# EAGLE board lcd_breakout (EAGLE 9.6.2)
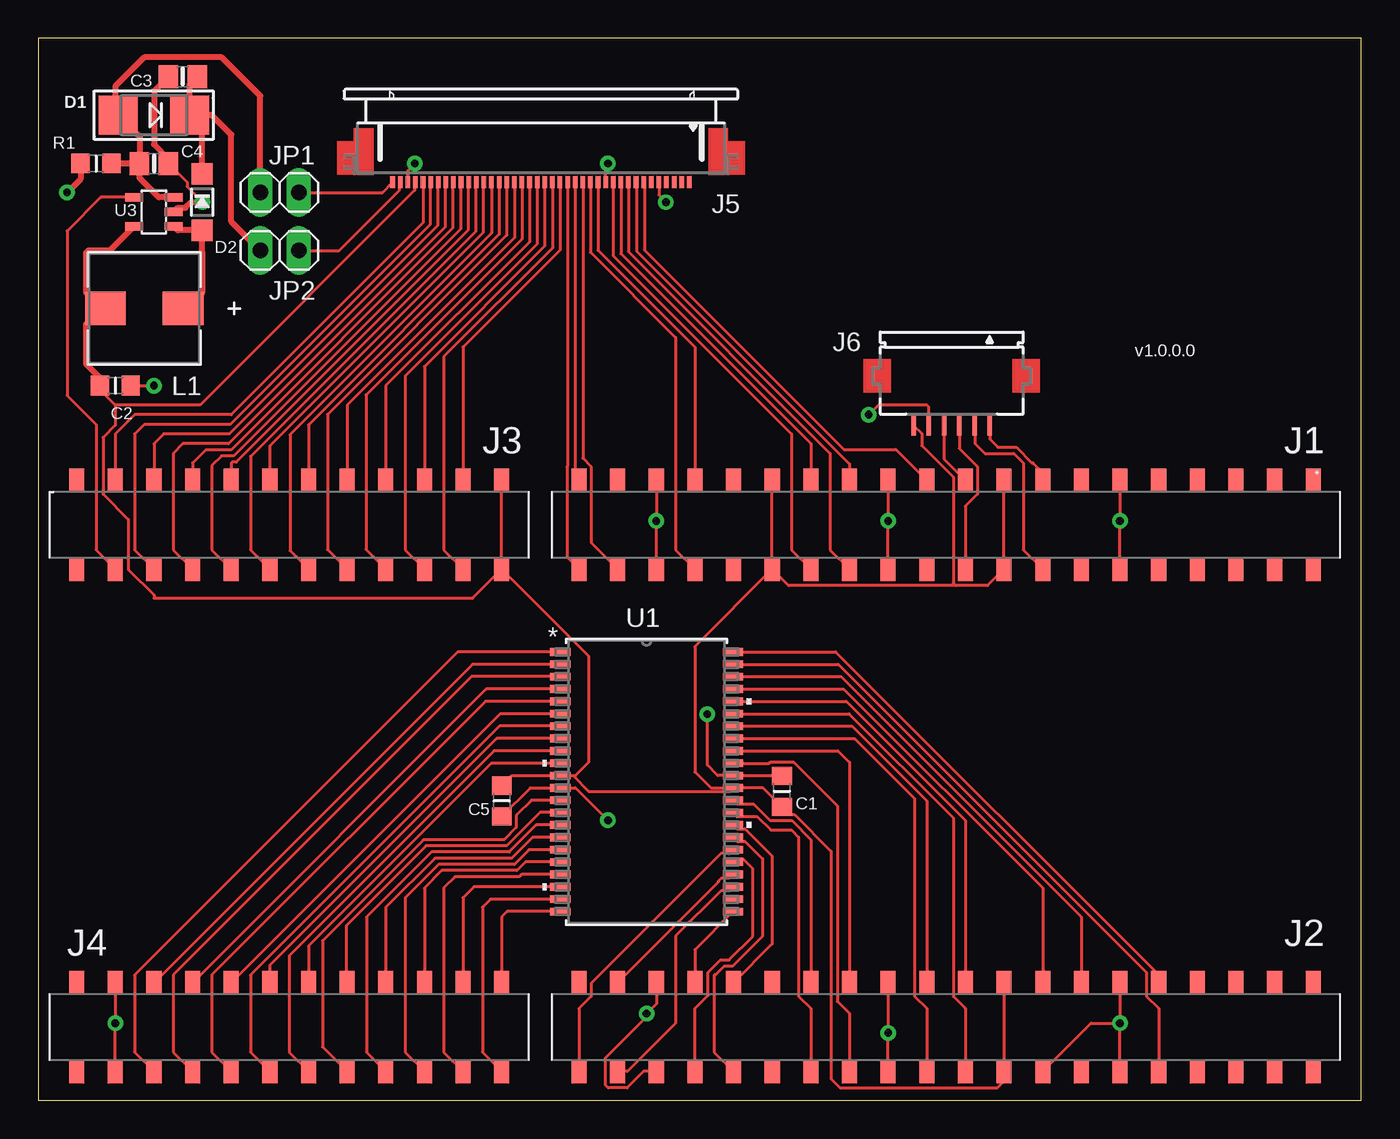
[diagram p0: board, top side]
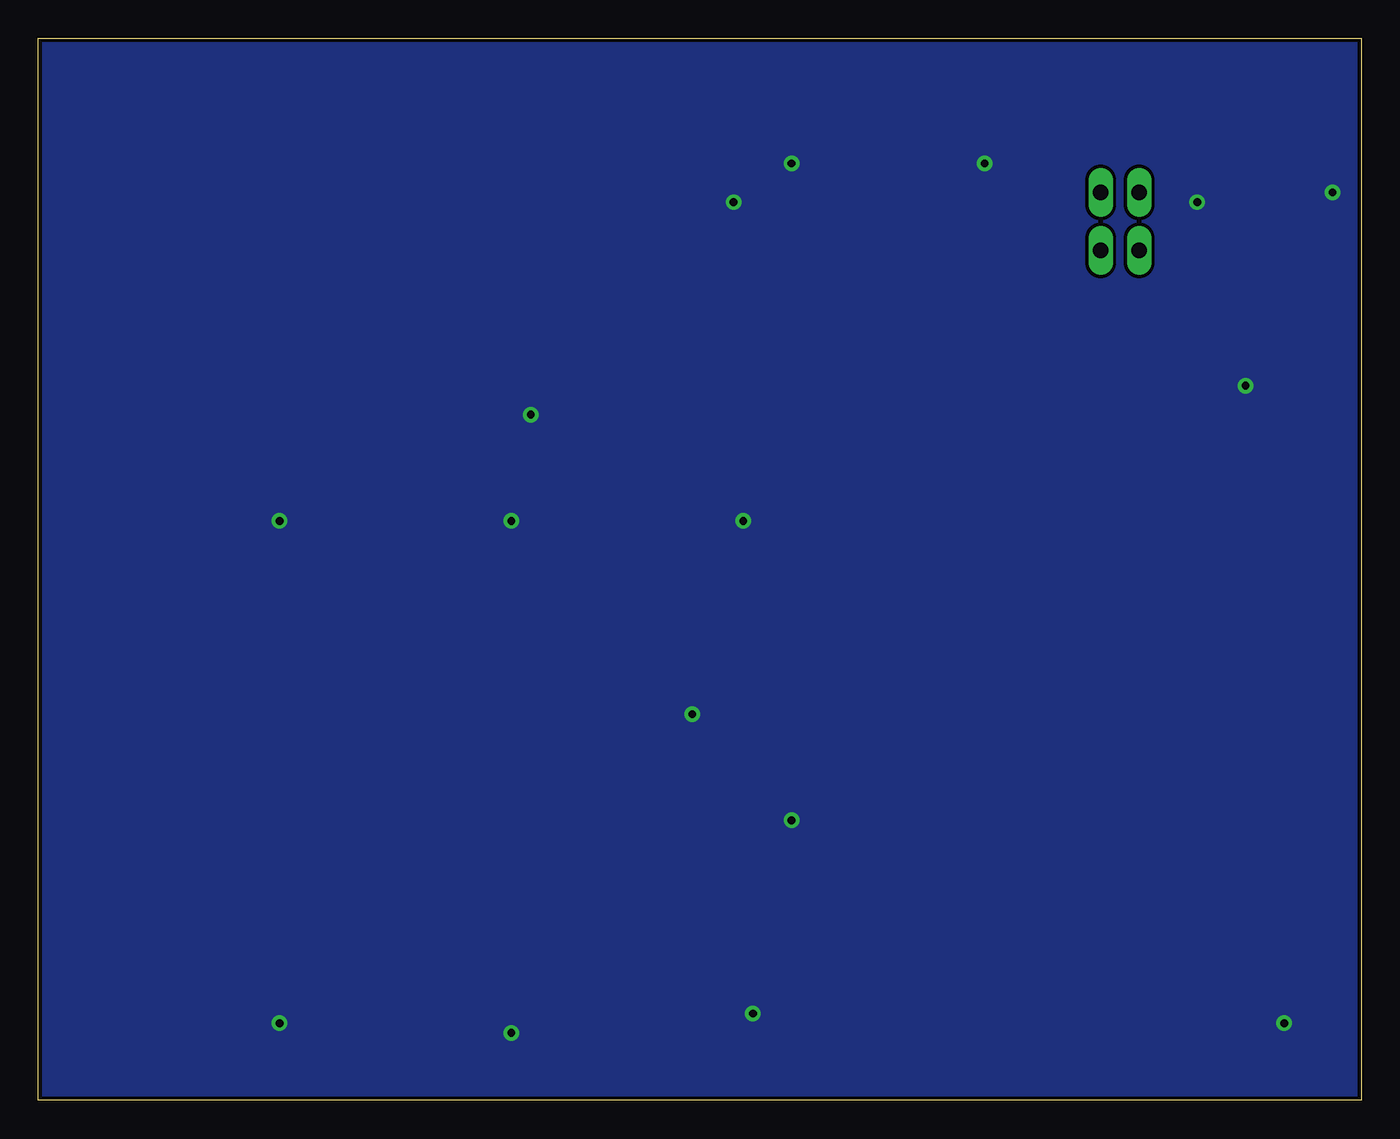
[diagram p1: board, bottom side, seen from below]

Size 87 x 69.84 mm. Coordinates in mm from the lower left corner, seen from the top.
Outline: 0,0 87,0.01 87,69.84 0,69.84 0,0
Copper layers (1*16): Top 0.035mm / dielectric 1.5mm / Bottom 0.035mm
Design rules "SparkFun": minimum track width 8mil, minimum drill 20mil, track to track 8mil, track to pad 8mil, pad to pad 8mil, via to via 8mil, smd to smd 8mil, copper to edge 10mil, drill to drill 8mil, minimum pad ring 12mil, minimum via ring 10mil, stop-mask expansion 4mil, vias tented up to drill 25mil, thermal gap 10mil

## Footprints (pad centres in the part's own frame; a part is rotated, then mirrored left to right if it is on the bottom)
_0805MP = smd 1.2 x 1.3: 1 -1.016,0; 2 1.016,0
0805-NO = smd 1.3 x 1.5: 1 -0.95,0; 2 0.95,0
SMADIODE = smd 2.54 x 2.54: A 2.349,0; C -2.349,0
SOD-123 = smd 1.4 x 1.4: A 1.85,0; C -1.85,0
54132-4097 = smd 0.3 x 0.8: 1 12.25,2.5; 2 11.75,2.5; 3 11.25,2.5; 4 10.75,2.5; 5 10.25,2.5; 6 9.75,2.5; 7 9.25,2.5; 8 8.75,2.5; 9 8.25,2.5; 10 7.75,2.5; 11 7.25,2.5; 12 6.75,2.5; 13 6.25,2.5; 14 5.75,2.5; 15 5.25,2.5; 16 4.75,2.5; 17 4.25,2.5; 18 3.75,2.5; 19 3.25,2.5; 20 2.75,2.5; 21 2.25,2.5; 22 1.75,2.5; 23 1.25,2.5; 24 0.75,2.5; 25 0.25,2.5; 26 -0.25,2.5; 27 -0.75,2.5; 28 -1.25,2.5; 29 -1.75,2.5; 30 -2.25,2.5; 31 -2.75,2.5; 32 -3.25,2.5; 33 -3.75,2.5; 34 -4.25,2.5; 35 -4.75,2.5; 36 -5.25,2.5; 37 -5.75,2.5; 38 -6.25,2.5; 39 -6.75,2.5; 40 -7.25,2.5
52271-0679 = smd 0.3 x 1.3: 1 1.5,3.25; 2 0.5,3.25; 3 -0.5,3.25; 4 -1.5,3.25; 5 -2.5,3.25; 6 -3.5,3.25
1X02 = drill 1.016 long: 1 -1.27,0; 2 1.27,0
IND_744314101_WRE = smd 2.692 x 2.21: 1 -2.553,0; 2 2.553,0
PTSB0044GG-A_REN = smd 1.321 x 0.508: 1 -5.677,8.534; 2 -5.677,7.722; 3 -5.677,6.909; 4 -5.677,6.096; 5 -5.677,5.283; 6 -5.677,4.47; 7 -5.677,3.658; 8 -5.677,2.845; 9 -5.677,2.032; 10 -5.677,1.219; 11 -5.677,0.406; 12 -5.677,-0.406; 13 -5.677,-1.219; 14 -5.677,-2.032; 15 -5.677,-2.845; 16 -5.677,-3.658; 17 -5.677,-4.47; 18 -5.677,-5.283; 19 -5.677,-6.096; 20 -5.677,-6.909; 21 -5.677,-7.722; 22 -5.677,-8.534; 23 5.677,-8.534; 24 5.677,-7.722; 25 5.677,-6.909; 26 5.677,-6.096; 27 5.677,-5.283; 28 5.677,-4.47; 29 5.677,-3.658; 30 5.677,-2.845; 31 5.677,-2.032; 32 5.677,-1.219; 33 5.677,-0.406; 34 5.677,0.406; 35 5.677,1.219; 36 5.677,2.032; 37 5.677,2.845; 38 5.677,3.658; 39 5.677,4.47; 40 5.677,5.283; 41 5.677,6.096; 42 5.677,6.909; 43 5.677,7.722; 44 5.677,8.534
MORPH-IC-II = smd 0.991 x 1.549: J1.1 -68.58,-18.542; J1.2 -68.58,-12.7; J1.3 -66.04,-18.542; J1.4 -66.04,-12.7; J1.5 -63.5,-18.542; J1.6 -63.5,-12.7; J1.7 -60.96,-18.542; J1.8 -60.96,-12.7; J1.9 -58.42,-18.542; J1.10 -58.42,-12.7; J1.11 -55.88,-18.542; J1.12 -55.88,-12.7; J1.13 -53.34,-18.542; J1.14 -53.34,-12.7; J1.15 -50.8,-18.542; J1.16 -50.8,-12.7; J1.17 -48.26,-18.542; J1.18 -48.26,-12.7; J1.19 -45.72,-18.542; J1.20 -45.72,-12.7; J1.21 -43.18,-18.542; J1.22 -43.18,-12.7; J1.23 -40.64,-18.542; J1.24 -40.64,-12.7; J1.25 -38.1,-18.542; J1.26 -38.1,-12.7; J1.27 -35.56,-18.542; J1.28 -35.56,-12.7; J1.29 -33.02,-18.542; J1.30 -33.02,-12.7; J1.31 -30.48,-18.542; J1.32 -30.48,-12.7; J1.33 -27.94,-18.542; J1.34 -27.94,-12.7; J1.35 -25.4,-18.542; J1.36 -25.4,-12.7; J1.37 -22.86,-18.542; J1.38 -22.86,-12.7; J1.39 -20.32,-18.542; J1.40 -20.32,-12.7; J2.1 -68.58,14.478; J2.2 -68.58,20.32; J2.3 -66.04,14.478; J2.4 -66.04,20.32; J2.5 -63.5,14.478; J2.6 -63.5,20.32; J2.7 -60.96,14.478; J2.8 -60.96,20.32; J2.9 -58.42,14.478; J2.10 -58.42,20.32; J2.11 -55.88,14.478; J2.12 -55.88,20.32; J2.13 -53.34,14.478; J2.14 -53.34,20.32; J2.15 -50.8,14.478; J2.16 -50.8,20.32; J2.17 -48.26,14.478; J2.18 -48.26,20.32; J2.19 -45.72,14.478; J2.20 -45.72,20.32; J2.21 -43.18,14.478; J2.22 -43.18,20.32; J2.23 -40.64,14.478; J2.24 -40.64,20.32; J2.25 -38.1,14.478; J2.26 -38.1,20.32; J2.27 -35.56,14.478; J2.28 -35.56,20.32; J2.29 -33.02,14.478; J2.30 -33.02,20.32; J2.31 -30.48,14.478; J2.32 -30.48,20.32; J2.33 -27.94,14.478; J2.34 -27.94,20.32; J2.35 -25.4,14.478; J2.36 -25.4,20.32; J2.37 -22.86,14.478; J2.38 -22.86,20.32; J2.39 -20.32,14.478; J2.40 -20.32,20.32; J3.1 -15.24,-18.542; J3.2 -15.24,-12.7; J3.3 -12.7,-18.542; J3.4 -12.7,-12.7; J3.5 -10.16,-18.542; J3.6 -10.16,-12.7; J3.7 -7.62,-18.542; J3.8 -7.62,-12.7; J3.9 -5.08,-18.542; J3.10 -5.08,-12.7; J3.11 -2.54,-18.542; J3.12 -2.54,-12.7; J3.13 0,-18.542; J3.14 0,-12.7; J3.15 2.54,-18.542; J3.16 2.54,-12.7; J3.17 5.08,-18.542; J3.18 5.08,-12.7; J3.19 7.62,-18.542; J3.20 7.62,-12.7; J3.21 10.16,-18.542; J3.22 10.16,-12.7; J3.23 12.7,-18.542; J3.24 12.7,-12.7; J4.1 -15.24,14.478; J4.2 -15.24,20.32; J4.3 -12.7,14.478; J4.4 -12.7,20.32; J4.5 -10.16,14.478; J4.6 -10.16,20.32; J4.7 -7.62,14.478; J4.8 -7.62,20.32; J4.9 -5.08,14.478; J4.10 -5.08,20.32; J4.11 -2.54,14.478; J4.12 -2.54,20.32; J4.13 0,14.478; J4.14 0,20.32; J4.15 2.54,14.478; J4.16 2.54,20.32; J4.17 5.08,14.478; J4.18 5.08,20.32; J4.19 7.62,14.478; J4.20 7.62,20.32; J4.21 10.16,14.478; J4.22 10.16,20.32; J4.23 12.7,14.478; J4.25 12.7,20.32
SOT23-5@1 = smd 0.55 x 1.2: 1 -0.95,-1.3; 2 0,-1.3; 3 0.95,-1.3; 4 0.95,1.3; 5 -0.95,1.3

## Placement (x,y rotation side)
C1  0.1uF  [_0805MP]  48.9,20.32 90 top
C2  10uF  [_0805MP]  5.08,46.99 0 top
C3  1uF  [0805-NO]  9.53,67.31 180 top
C4  0.1uF  [0805-NO]  7.62,61.59 0 top
C5  0.1uF  [_0805MP]  30.48,19.68 270 top
D1  MM3Z18VT1G  [SMADIODE]  7.62,64.77 180 top
D2  MBR0540  [SOD-123]  10.79,59.05 270 top
J5  NHD-5.0-800480TF-ATXL-CTP_LCD  [54132-4097]  35.56,62.87 180 top
J6  NHD-5.0-800480TF-ATXL-CTP_TOUCH  [52271-0679]  59.05,47.62 180 top
JP1  [1X02]  15.88,59.69 0 top
JP2  [1X02]  15.88,55.88 0 top
L1  10 uH  [IND_744314101_WRE]  6.99,52.07 180 top
R1  5.6  [_0805MP]  3.81,61.59 0 top
U1  RMLV0416EGSB-4S2HA1  [PTSB0044GG-A_REN]  40.01,20.95 0 top
U2  FTDI_MORPH-IC_II  [MORPH-IC-II]  15.24,22.23 180 top
U3  FAN5333BSX  [SOT23-5@1]  7.62,58.42 90 top

## Library data of the parts
C1 C4 C5 = microbuilder; DPN: 478-12799-1-ND; MPN: 0805ZD104KAT2A
C2 = microbuilder; DPN: 1276-6456-1-ND; MPN: CL21A106KPFNNNG
C3 = microbuilder; DPN: 1276-2395-1-ND; MPN: CL21A105KACLNNC
D1 = microbuilder; DPN: MM3Z18VT1GOSCT-ND; MPN: MM3Z18VT1G
D2 = microbuilder; DPN: MBR0540CT-ND; MPN: MBR0540
J5 = ik; DPN: WM3431CT-ND; MPN: 54104-4031
J6 = ik; DPN: WM7955CT-ND; MPN: 52271-0679
JP1 JP2 = pinhead; DPN: A121364-ND; MPN: 4-103328-1
L1 = ultralibrarian; BUILT_BY: EMA_Justin; COPYRIGHT: Copyright (C) 2016 Accelerated Designs. All rights reserved; DPN: 732-2180-1-ND; MANUFACTURER_PART_NUMBER: 744314101; MPN: 744314101; SOURCELIBRARY: Wurth_2018-12-15; VENDOR: Wurth Electronics
R1 = microbuilder; DPN: 311-5.60CRCT-ND; MPN: RC0805FR-075R6L
U1 = ultralibrarian; BUILT_BY: EMA_Jessica; COPYRIGHT: Copyright (C) 2018 Accelerated Designs. All rights reserved; DPN: RMLV0416EGSB-4S2; MANUFACTURER_PART_NUMBER: RMLV0416EGSB-4S2#HA1; MPN: RMLV0416EGSB-4S2#HA1; SOURCELIBRARY: Renesas_2019-10-17_1; VENDOR: Renesas Electronics
U2 = ik; DPN: 2x S5729-ND, 2x S5721-ND; MPN: 2x NPPC202KFMS-RC, 2x NPPC122KFMS-RC
U3 = microbuilder; DPN: FAN5333BSXCT-ND; MPN: FAN5333BSX

## Nets
+3V3: C1.1 C2.1 C5.1 J5.4 J6.1 L1.2 U1.11 U1.33 U2.J1.17 U2.J1.18 U2.J1.29 U2.J1.30 U2.J2.17 U2.J2.18 U2.J3.1 U2.J3.2 U3.5
+18V: C3.1 D1.C D2.C JP2.1
ADDR_A0: U1.5 U2.J4.16
ADDR_A1: U1.4 U2.J4.17
ADDR_A2: U1.3 U2.J4.18
ADDR_A3: U1.2 U2.J4.19
ADDR_A4: U1.1 U2.J4.20
ADDR_A5: U1.44 U2.J2.9
ADDR_A6: U1.43 U2.J2.10
ADDR_A7: U1.42 U2.J2.13
ADDR_A8: U1.27 U2.J2.34
ADDR_A9: U1.26 U2.J2.37
ADDR_A10: U1.25 U2.J2.38
ADDR_A11: U1.24
ADDR_A12: U1.23 U2.J2.33
ADDR_A13: U1.22 U2.J4.1
ADDR_A14: U1.21 U2.J4.2
ADDR_A15: U1.20 U2.J4.3
ADDR_A16: U1.19 U2.J4.4
ADDR_A17: U1.18 U2.J4.5
B0: J5.21 U2.J3.5
B1: J5.22 U2.J3.4
B2: J5.23 U2.J3.3
B3: J5.24 U2.J1.40
B4: J5.25 U2.J1.39
B5: J5.26 U2.J1.38
B6: J5.27 U2.J1.34
B7: J5.28 U2.J1.33
CLKIN: J5.30 U2.J1.28
DATA_IO0: U1.7 U2.J4.14
DATA_IO1: U1.8 U2.J4.13
DATA_IO2: U1.9 U2.J4.12
DATA_IO3: U1.10 U2.J4.11
DATA_IO4: U1.13 U2.J4.10
DATA_IO5: U1.14 U2.J4.9
DATA_IO6: U1.15 U2.J4.8
DATA_IO7: U1.16 U2.J4.7
DATA_IO8: U1.29 U2.J2.32
DATA_IO9: U1.30 U2.J2.31
DATA_IO10: U1.31 U2.J2.28
DATA_IO11: U1.32 U2.J2.27
DATA_IO12: U1.35 U2.J2.26
DATA_IO13: U1.36 U2.J2.25
DATA_IO14: U1.37 U2.J2.22
DATA_IO15: U1.38 U2.J2.21
DEN: J5.34 U2.J1.21
G0: J5.13 U2.J3.13
G1: J5.14 U2.J3.12
G2: J5.15 U2.J3.11
G3: J5.16 U2.J3.10
G4: J5.17 U2.J3.9
G5: J5.18 U2.J3.8
G6: J5.19 U2.J3.7
G7: J5.20 U2.J3.6
GND: C1.2 C2.2 C3.2 C4.2 C5.2 J5.3 J5.29 J5.36 J6.2 R1.1 U1.12 U1.34 U2.J1.11 U2.J1.12 U2.J1.23 U2.J1.24 U2.J1.35 U2.J1.36 U2.J2.11 U2.J2.12 U2.J2.16 U2.J2.23 U2.J2.24 U2.J2.35 U2.J2.36 U2.J4.21 U2.J4.22 U3.2
HSD: J5.32 U2.J1.26
INTN: J6.5 U2.J1.16
LED+: J5.2 JP2.2
LED-: J5.1 JP1.2
LEDK: C4.1 D1.A JP1.1 R1.2 U3.3
LIGHT: U2.J3.22 U3.4
N$8: D2.A L1.1 U3.1
R0: J5.5 U2.J3.21
R1: J5.6 U2.J3.20
R2: J5.7 U2.J3.19
R3: J5.8 U2.J3.18
R4: J5.9 U2.J3.17
R5: J5.10 U2.J3.16
R6: J5.11 U2.J3.15
R7: J5.12 U2.J3.14
RSTN: J6.6 U2.J1.15
SCL: J6.3 U2.J1.19
SDA: J6.4 U2.J1.20
SRAM_CS2: U1.28 U2.J2.40
SRAM_CS_N: U1.6 U2.J4.15
SRAM_LB_N: U1.39 U2.J2.20
SRAM_OE_N: U1.41 U2.J2.15
SRAM_UB_N: U1.40 U2.J2.19
SRAM_WE_N: U1.17 U2.J4.6
STBYB: J5.31 U2.J1.27
VCCSW: U2.J1.2
VCCUSB: U2.J1.1
VSD: J5.33 U2.J1.25

## Tracks (layer width: path | path; a pad name or v marks a point on that pad's centre or on a via)
+3V3
  Top 0.203: U1.11 34.3,21.34 35.31,21.34 36.2,22.23 36.2,29.21 U2.J3.2 | 45.72,20.55 47.65,20.55 C1.1 49.39,18.81 49.71,18.81 52.13,16.39 52.13,1.41 52.72,0.83 63.06,0.83 63.5,1.27 U2.J2.18 U2.J2.17 | 45.72,20.55 U1.33 44.22,20.55 43.18,21.59 43.18,29.84 U2.J1.30 | C5.1 31.14,21.36 U1.11 | J5.4 24.77,60.32 24.77,59.84 10.65,45.72 5.08,45.72 | 5.08,45.72 4.06,46.74 C2.1 | 5.08,45.72 5.08,44.39 4.28,43.59 4.28,39.87 5.94,38.2 5.94,34.9 7.62,33.22 7.62,33.02 28.57,33.02 U2.J3.2 | U2.J3.2 U2.J3.1 | U1.11 35.15,21.36 36.2,20.32 45.49,20.32 45.72,20.55 | U2.J1.30 U2.J1.29 | J6.1 58.1,43.83 58.1,43.05 60.16,40.99 60.16,34.02 60.34,33.85 | 60.34,33.85 62.42,33.85 U2.J1.18 U2.J1.17 | 60.34,33.85 49.34,33.85 U2.J1.30
  Top 0.406: C2.1 4.06,47.51 3.16,48.41 3.16,51.03 3.33,51.19 3.56,51.19 L1.2 3.56,52.95 3.33,52.95 3.16,53.11 3.16,55.73 3.33,55.89 4.74,55.89 U3.5
+18V
  Top 0.406: D2.C 10.79,64.77 | 10.79,64.77 10.16,64.77 D1.C 9.97,66.81 C3.1 | JP2.1 12.7,57.78 12.7,63.5 11.43,64.77 10.79,64.77
ADDR_A0
  Top 0.203: U1.5 29.41,26.24 11.43,8.26 11.43,3.17 U2.J4.16
ADDR_A1
  Top 0.203: U1.4 29.46,27.05 U2.J4.17
ADDR_A2
  Top 0.203: U1.3 28.5,27.86 8.89,8.26 8.89,3.17 U2.J4.18
ADDR_A3
  Top 0.203: U1.2 28.55,28.68 U2.J4.19
ADDR_A4
  Top 0.203: U1.1 27.58,29.49 6.35,8.26 6.35,3.17 U2.J4.20
ADDR_A5
  Top 0.203: U1.44 52.43,29.49 73.66,8.26 U2.J2.9
ADDR_A6
  Top 0.203: U1.43 52.6,28.68 72.86,8.42 72.86,6.85 73.66,6.05 U2.J2.10
ADDR_A7
  Top 0.203: U1.42 52.78,27.86 68.58,12.06 U2.J2.13
ADDR_A8
  Top 0.203: U2.J2.34 43.18,6.05 44.04,6.91 44.04,8.42 44.85,9.23 45.43,9.23 46.99,10.79 46.99,15.24 46.35,15.88 45.88,15.88 U1.27
ADDR_A9
  Top 0.203: U1.26 45.43,14.61 44.9,14.61 44.72,14.43 44.72,14.36 U2.J2.37
ADDR_A10
  Top 0.203: U1.25 45.43,13.79 44.9,13.79 41.91,10.81 41.91,5.08 38.73,1.91 U2.J2.38
ADDR_A12
  Top 0.203: U1.23 43.18,9.92 U2.J2.33
ADDR_A13
  Top 0.203: U1.22 30.84,12.42 30.48,12.06 U2.J4.1
ADDR_A14
  Top 0.203: U1.21 29.74,13.23 29.21,12.7 29.21,3.17 U2.J4.2
ADDR_A15
  Top 0.203: U1.20 28.65,14.05 27.94,13.34 U2.J4.3
ADDR_A16
  Top 0.203: U1.19 31.8,14.86 31.65,14.71 27.41,14.71 26.67,13.97 26.67,3.17 U2.J4.4
ADDR_A17
  Top 0.203: U1.18 32.04,15.67 31.48,15.11 26.54,15.11 25.4,13.97 U2.J4.5
B0
  Top 0.203: J5.21 33.31,56.17 25.4,48.26 U2.J3.5
B1
  Top 0.203: J5.22 33.81,56.03 26.67,48.9 26.67,36.2 U2.J3.4
B2
  Top 0.203: J5.23 34.31,55.9 27.94,49.53 U2.J3.3
B3
  Top 0.203: J5.24 34.81,41.72 34.76,41.67 34.76,35.73 U2.J1.40
B4
  Top 0.203: J5.25 35.31,41.02 U2.J1.39
B5
  Top 0.203: J5.26 35.81,42.22 36.36,41.67 36.36,36.66 U2.J1.38
B6
  Top 0.203: J5.27 36.31,55.77 41.91,50.16 41.91,36.2 U2.J1.34
B7
  Top 0.203: J5.28 36.81,55.9 43.18,49.53 U2.J1.33
CLKIN
  Top 0.203: J5.30 37.81,55.53 49.53,43.81 49.53,36.2 U2.J1.28
DATA_IO0
  Top 0.203: U1.7 30.33,24.61 13.97,8.26 13.97,3.17 U2.J4.14
DATA_IO1
  Top 0.203: U1.8 30.15,23.8 15.24,8.89 U2.J4.13
DATA_IO2
  Top 0.203: U2.J4.12 16.51,3.17 16.51,9.53 29.97,22.99 U1.9
DATA_IO3
  Top 0.203: U1.10 29.79,22.17 17.78,10.16 U2.J4.11
DATA_IO4
  Top 0.203: U1.13 32.44,19.74 31.43,18.73 31.43,17.94 30.64,17.14 25.34,17.14 18.7,10.51 18.7,3.52 U2.J4.10
DATA_IO5
  Top 0.203: U1.14 32.99,18.92 30.8,16.74 25.51,16.74 20.26,11.49 20.26,7.81 U2.J4.9
DATA_IO6
  Top 0.203: U1.15 32.75,18.11 30.97,16.33 25.86,16.33 21.59,12.06 21.59,3.17 U2.J4.8
DATA_IO7
  Top 0.203: U1.16 32.51,17.3 31.14,15.93 26.09,15.93 22.86,12.7 U2.J4.7
DATA_IO8
  Top 0.203: U1.29 45.94,17.04 46.47,17.04 47.62,15.89 47.62,10.79 45.66,8.83 45.1,8.83 44.53,8.26 44.45,8.26 44.45,3.17 U2.J2.32
DATA_IO9
  Top 0.203: U1.30 45.94,17.86 46.47,17.86 48.26,16.07 48.26,10.29 U2.J2.31
DATA_IO10
  Top 0.203: U1.31 45.94,18.67 47.27,18.67 48.16,17.78 49.53,17.78 50,17.31 50,6.85 50.8,6.05 U2.J2.28
DATA_IO11
  Top 0.203: U1.32 45.94,19.48 47.04,19.48 48.12,18.4 49.55,18.4 50.8,17.14 U2.J2.27
DATA_IO12
  Top 0.203: U1.35 48.05,22.17 48.12,22.24 49.67,22.24 52.54,19.37 52.54,6.51 53.34,5.71 U2.J2.26
DATA_IO13
  Top 0.203: U1.36 52.58,22.99 53.34,22.23 U2.J2.25
DATA_IO14
  Top 0.203: U1.37 53.67,23.8 57.62,19.85 57.62,6.85 58.42,6.05 U2.J2.22
DATA_IO15
  Top 0.203: U1.38 53.49,24.61 58.42,19.68 U2.J2.21
DEN
  Top 0.203: J5.34 39.85,60.32 39.85,55.91 52.96,42.8 56.38,42.8 U2.J1.21
G0
  Top 0.203: J5.13 29.27,60.32 29.27,57.05 15.24,43.03 U2.J3.13
G1
  Top 0.203: J5.14 29.81,57.02 16.56,43.77 16.56,36.15 U2.J3.12
G2
  Top 0.203: J5.15 30.31,56.95 17.78,44.42 U2.J3.11
G3
  Top 0.203: J5.16 30.81,56.87 19.04,45.1 19.04,36.21 U2.J3.10
G4
  Top 0.203: J5.17 31.31,56.71 20.32,45.72 U2.J3.9
G5
  Top 0.203: J5.18 31.81,56.63 21.56,46.38 21.56,36.23 U2.J3.8
G6
  Top 0.203: J5.19 32.31,56.44 22.86,46.99 U2.J3.7
G7
  Top 0.203: J5.20 32.81,56.3 24.13,47.62 24.13,36.2 U2.J3.6
GND  (via drill 0.51)
  Top 0.203: C1.2 45.71,21.34 U1.34 44.68,21.36 43.99,22.05 v43.99,25.4 | C5.2 32.36,20.55 U1.12 35.33,20.55 v37.47,18.41 | J5.36 40.81,59.52 v41.27,59.05 | U2.J1.11 v71.12,38.1 U2.J1.12 | C2.2 v7.62,46.99 | U2.J4.22 v5.08,5.08 U2.J4.21 | U2.J2.35 40.64,6.35 v40.01,5.71 40.01,5.51 37.3,2.81 37.3,1 37.48,0.83 38.72,0.83 39.8,1.91 U2.J2.36 | U2.J2.24 v55.88,4.45 U2.J2.23 | U2.J2.11 v71.12,5.08 | U2.J2.12 v71.12,5.08 | U2.J2.16 69.22,5.08 v71.12,5.08 | U2.J1.35 v40.64,38.1 U2.J1.36 | U2.J1.24 v55.88,38.1 U2.J1.23 | J6.2 58.55,45.59 58.42,45.72 55.24,45.72 v54.61,45.09 | C4.2 9.79,60.38 9.79,60.08 10.79,59.07 v10.79,59.05 | J5.3 24.31,61.14 v24.77,61.59 | J5.29 37.31,61.44 v37.47,61.59
  Top 0.406: C3.2 7.62,66.36 7.62,62.87 8.57,61.91 C4.2 | R1.1 2.79,60.58 v1.91,59.69 | U3.2 9.19,58.69 9.69,58.69 10.05,59.05 v10.79,59.05
  pour Bottom (isolate 0): 0,69.85 0,0 87,0 87,69.85
HSD
  Top 0.203: J5.32 38.81,55.8 52.07,42.55 52.07,36.2 U2.J1.26
INTN
  Top 0.203: J6.5 61.59,44.34 61.59,43.18 62.23,42.55 64.14,42.55 64.77,41.91 64.77,36.2 U2.J1.16
LED+
  Top 0.203: J5.2 23.77,60.32 23.77,59.84 19.81,55.88 JP2.2
LED-
  Top 0.203: JP1.2 22.64,59.69 J5.1
LEDK
  Top 0.406: U3.3 7.94,59.37 6.67,60.64 C4.1 | C4.1 R1.2 | C4.1 6.67,63.37 D1.A 5.27,64.33 5.08,64.14 5.08,66.67 6.99,68.58 12.06,68.58 14.61,66.04 JP1.1
LIGHT
  Top 0.203: U3.4 4.12,59.37 1.91,57.15 1.91,46.35 3.81,44.45 3.81,36.2 U2.J3.22
N$8
  Top 0.406: L1.1 10.41,52.95 10.64,52.95 10.81,53.11 10.81,55.73 10.79,55.74 D2.A 9.19,57.2 U3.1
R0
  Top 0.203: J5.5 25.31,57.7 12.7,45.09 6.35,45.09 5.08,43.81 U2.J3.21
R1
  Top 0.203: J5.6 25.77,60.32 25.77,57.58 12.64,44.45 6.99,44.45 6.35,43.81 6.35,36.2 U2.J3.20
R2
  Top 0.203: J5.7 26.27,60.32 26.27,57.5 12.58,43.81 8.26,43.81 7.62,43.18 U2.J3.19
R3
  Top 0.203: J5.8 26.77,60.32 26.77,57.43 12.52,43.18 9.53,43.18 8.89,42.55 8.89,36.2 U2.J3.18
R4
  Top 0.203: J5.9 27.27,60.32 27.27,57.35 12.69,42.77 11.02,42.77 10.16,41.91 U2.J3.17
R5
  Top 0.203: J5.10 27.77,60.32 27.77,57.28 12.86,42.37 12.06,42.37 11.43,41.73 11.43,36.2 U2.J3.16
R6
  Top 0.203: J5.11 28.27,60.32 28.27,57.2 13.02,41.96 12.75,41.96 12.7,41.91 U2.J3.15
R7
  Top 0.203: J5.12 28.77,60.32 28.77,57.13 13.97,42.33 13.97,36.2 U2.J3.14
RSTN
  Top 0.203: J6.6 62.55,43.49 63.09,42.95 64.3,42.95 65.34,41.91 65.41,41.91 66.04,41.27 U2.J1.15
SCL
  Top 0.203: J6.3 59.55,42.17 U2.J1.19
SDA
  Top 0.203: J6.4 60.55,42.87 61.76,41.67 61.76,39.87 60.96,39.07 U2.J1.20
SRAM_CS2
  Top 0.203: U1.28 45.43,16.23 44.88,16.23 36.36,7.71 36.36,6.85 35.56,6.05 U2.J2.40
SRAM_CS_N
  Top 0.203: U1.6 30.38,25.43 U2.J4.15
SRAM_LB_N
  Top 0.203: U1.39 53.31,25.43 60.16,18.58 60.16,6.85 60.96,6.05 U2.J2.20
SRAM_OE_N
  Top 0.203: U1.41 52.96,27.05 66.04,13.97 U2.J2.15
SRAM_UB_N
  Top 0.203: U1.40 53.14,26.24 60.96,18.41 U2.J2.19
SRAM_WE_N
  Top 0.203: U1.17 32.28,16.48 31.31,15.52 26.31,15.52 24.13,13.34 24.13,3.17 U2.J4.6
STBYB
  Top 0.203: J5.31 38.31,55.67 50.8,43.18 U2.J1.27
VSD
  Top 0.203: J5.33 39.35,60.32 39.35,55.84 53.34,41.85 U2.J1.25

## Text on the board
tNames: v1.0.0.0 | J3 | J1 | J4 | J2